# EAGLE board SparkFun_HX711_Load_Cell-Panel-v11 (EAGLE 7.5.0), part 1 of 4
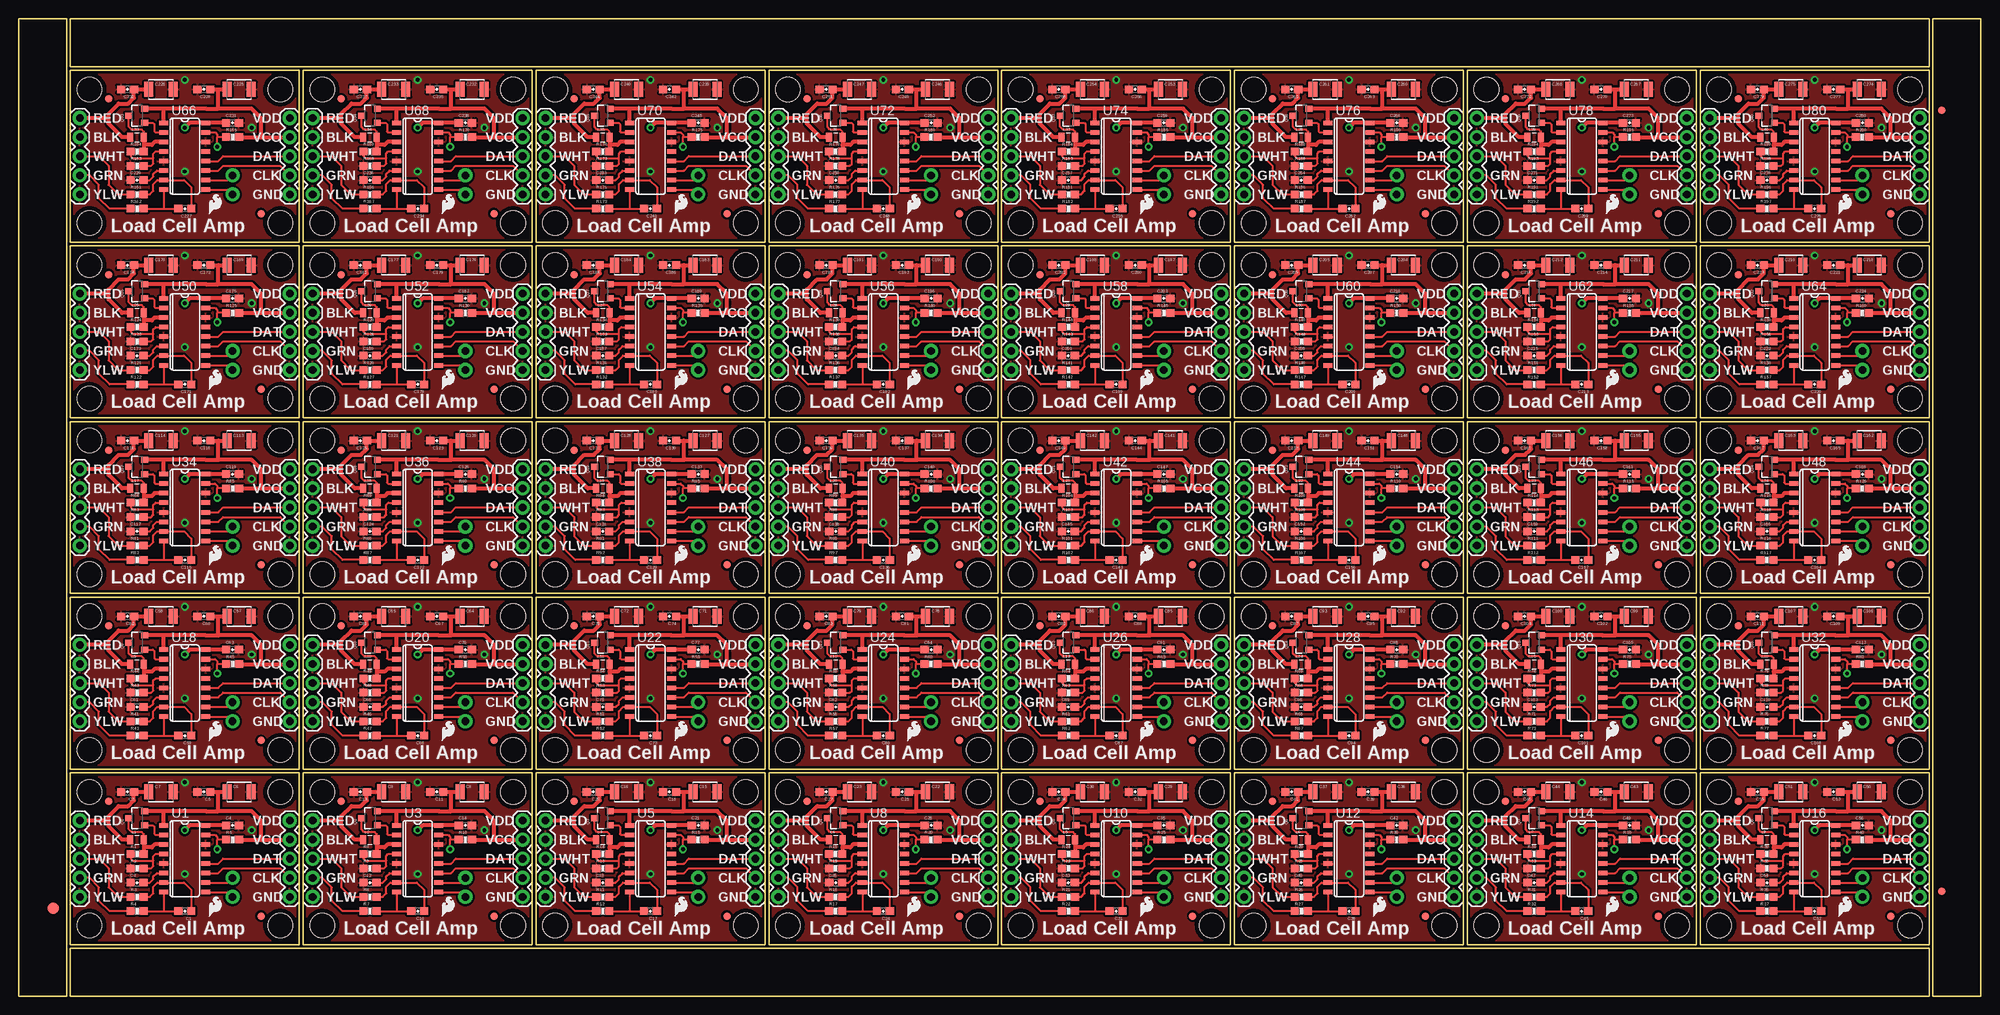
[diagram p0: board, top side]
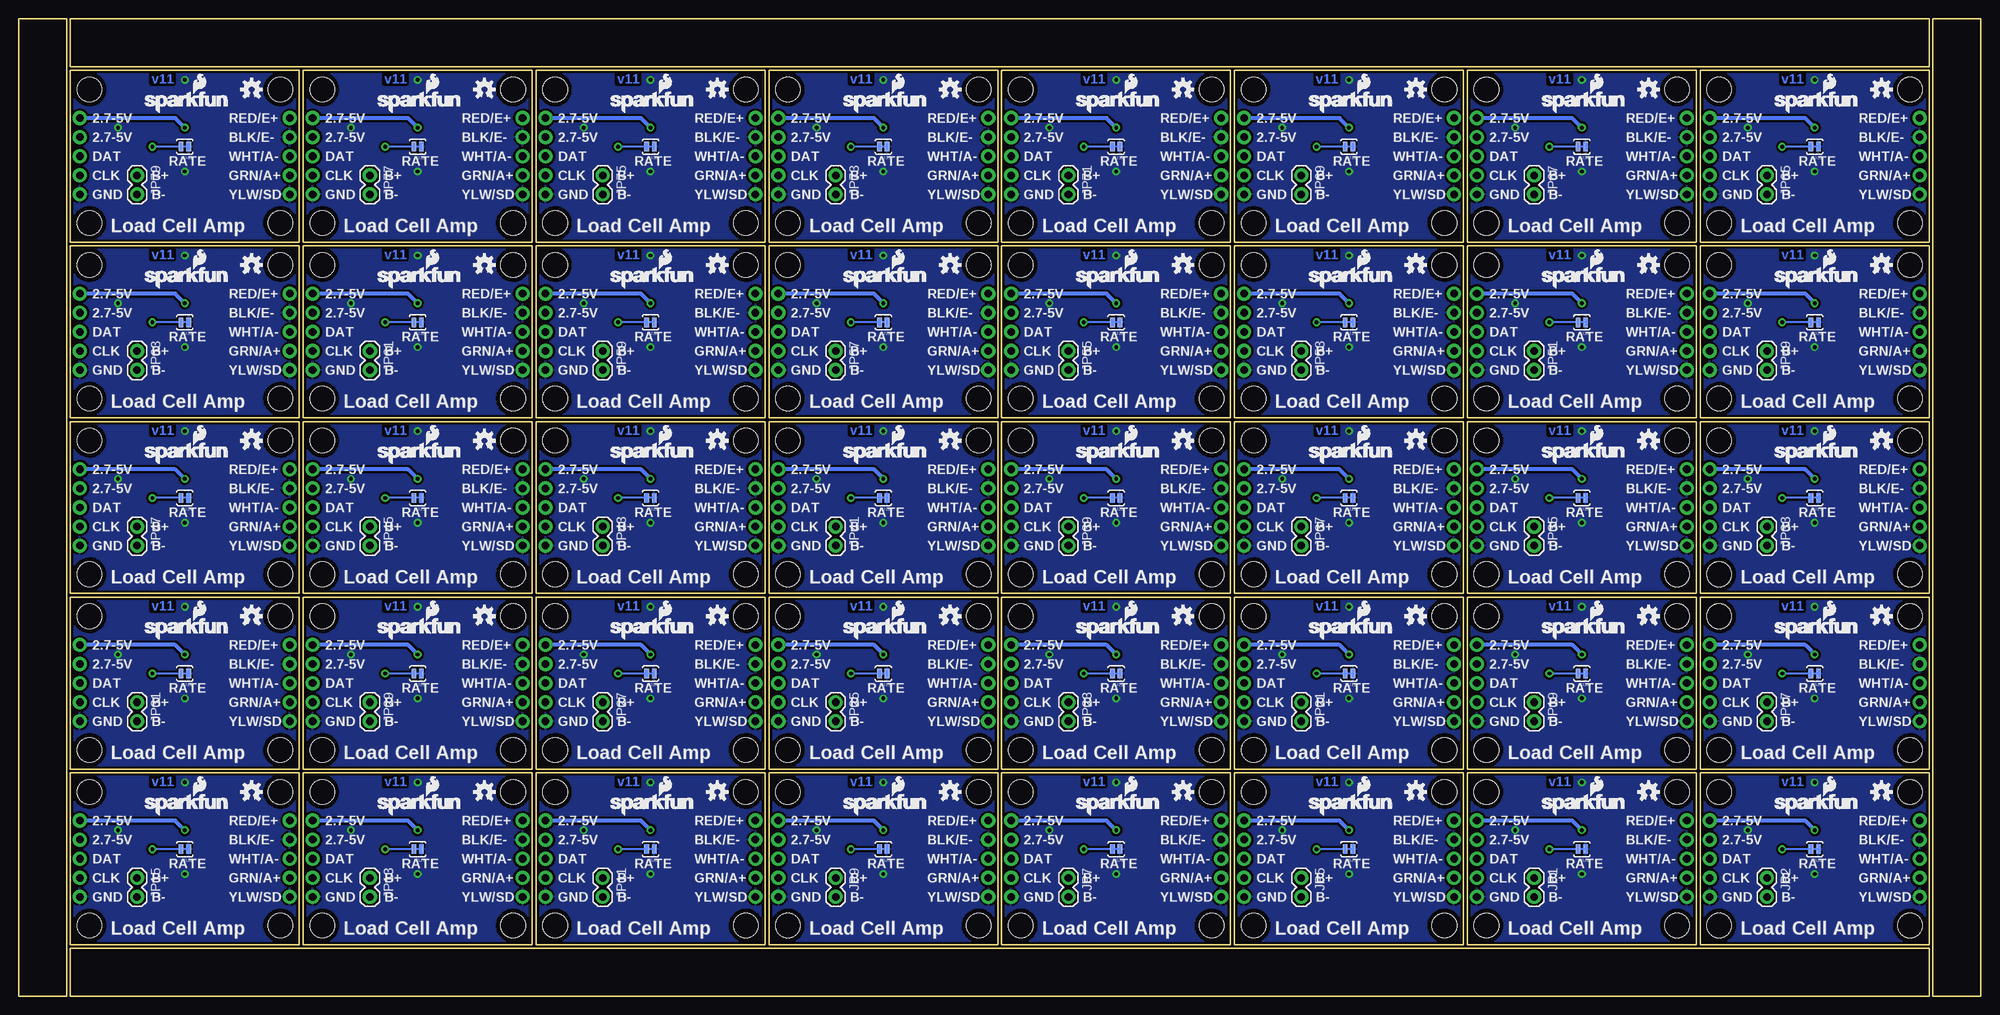
[diagram p1: board, bottom side, seen from below]

Size 261.11 x 130.05 mm. Coordinates in mm from the lower left corner, seen from the top.
Outline: 184 segments
Copper layers (1*16): Top 0.035mm / dielectric 1.5mm / Bottom 0.035mm
Design rules "SparkFun-2-layer-STANDARD": minimum track width 10mil, minimum drill 20mil, track to track 10mil, track to pad 8mil, pad to pad 8mil, via to via 10mil, smd to smd 8mil, copper to edge 8mil, drill to drill 8mil, minimum pad ring 10mil, minimum via ring 10mil, stop-mask expansion 4mil, vias tented up to drill 25mil, thermal gap 10mil

## Footprints (pad centres in the part's own frame; a part is rotated, then mirrored left to right if it is on the bottom)
0603-CAP = smd 1.1 x 1: 1 -0.85,0; 2 0.85,0
1210 = smd 1.2 x 2: 1 -1.6,0; 2 1.6,0
FIDUCIAL-1.5X3 = smd 1.5 x 1.5: 1 0,0
FIDUCIAL-1X2 = smd 1 x 1: 1 0,0
1X05 = drill 1.016 pad 1.88: 1 0,0; 2 2.54,0; 3 5.08,0; 4 7.62,0; 5 10.16,0
1X02 = drill 1.016 pad 1.88: 1 0,0; 2 2.54,0
0805 = smd 0.8 x 1.2: 1 -0.9,0; 2 0.9,0
SOT23-3 = smd 0.8 x 0.9: 1 -0.95,-1; 2 0.95,-1; 3 0,1.1
0603-RES = smd 1.1 x 1: 1 -0.85,0; 2 0.85,0
PAD-JUMPER-2-NC_BY_TRACE_YES_SILK = smd 0.635 x 1.27: 1 -0.508,0; 2 0.508,0
STAND-OFF = hole 3.302: 0,0
SO16 = smd 0.6 x 1.2: 1 -4.445,-2.8; 2 -3.175,-2.8; 3 -1.905,-2.8; 4 -0.635,-2.8; 5 0.635,-2.8; 6 1.905,-2.8; 7 3.175,-2.8; 8 4.445,-2.8; 9 4.445,2.8; 10 3.175,2.8; 11 1.905,2.8; 12 0.635,2.8; 13 -0.635,2.8; 14 -1.905,2.8; 15 -3.175,2.8; 16 -4.445,2.8

## Placement (x,y rotation side)
C1  0.1uF  [0603-CAP]  22.1,11.3 180 top
C2  0.1uF  [0603-CAP]  15.75,15.11 0 top
C3  0.1uF  [0603-CAP]  14.48,27.18 180 top
C4  0.1uF  [0603-CAP]  28.45,22.73 0 top
C5  0.1uF  [0603-CAP]  24.64,27.18 180 top
C6  10uF  [1210]  29.34,27.18 0 top
C7  10uF  [1210]  18.92,27.18 0 top
C8  10uF  [1210]  60.33,27.18 0 top
C9  10uF  [1210]  49.91,27.18 0 top
C10  0.1uF  [0603-CAP]  53.09,11.3 180 top
C11  0.1uF  [0603-CAP]  55.63,27.18 180 top
C12  0.1uF  [0603-CAP]  46.74,15.11 0 top
C13  0.1uF  [0603-CAP]  45.47,27.18 180 top
C14  0.1uF  [0603-CAP]  59.44,22.73 0 top
C15  10uF  [1210]  91.31,27.18 0 top
C16  10uF  [1210]  80.9,27.18 0 top
C17  0.1uF  [0603-CAP]  84.07,11.3 180 top
C18  0.1uF  [0603-CAP]  86.61,27.18 180 top
C19  0.1uF  [0603-CAP]  77.72,15.11 0 top
C20  0.1uF  [0603-CAP]  76.45,27.18 180 top
C21  0.1uF  [0603-CAP]  90.42,22.73 0 top
C22  10uF  [1210]  122.3,27.18 0 top
C23  10uF  [1210]  111.89,27.18 0 top
C24  0.1uF  [0603-CAP]  115.06,11.3 180 top
C25  0.1uF  [0603-CAP]  117.6,27.18 180 top
C26  0.1uF  [0603-CAP]  108.71,15.11 0 top
C27  0.1uF  [0603-CAP]  107.44,27.18 180 top
C28  0.1uF  [0603-CAP]  121.41,22.73 0 top
C29  10uF  [1210]  153.29,27.18 0 top
C30  10uF  [1210]  142.88,27.18 0 top
C31  0.1uF  [0603-CAP]  146.05,11.3 180 top
C32  0.1uF  [0603-CAP]  148.59,27.18 180 top
C33  0.1uF  [0603-CAP]  139.7,15.11 0 top
C34  0.1uF  [0603-CAP]  138.43,27.18 180 top
C35  0.1uF  [0603-CAP]  152.4,22.73 0 top
C36  10uF  [1210]  184.28,27.18 0 top
C37  10uF  [1210]  173.86,27.18 0 top
C38  0.1uF  [0603-CAP]  177.04,11.3 180 top
C39  0.1uF  [0603-CAP]  179.58,27.18 180 top
C40  0.1uF  [0603-CAP]  170.69,15.11 0 top
C41  0.1uF  [0603-CAP]  169.42,27.18 180 top
C42  0.1uF  [0603-CAP]  183.39,22.73 0 top
C43  10uF  [1210]  215.26,27.18 0 top
C44  10uF  [1210]  204.85,27.18 0 top
C45  0.1uF  [0603-CAP]  208.03,11.3 180 top
C46  0.1uF  [0603-CAP]  210.57,27.18 180 top
C47  0.1uF  [0603-CAP]  201.68,15.11 0 top
C48  0.1uF  [0603-CAP]  200.41,27.18 180 top
C49  0.1uF  [0603-CAP]  214.38,22.73 0 top
C50  10uF  [1210]  246.25,27.18 0 top
C51  10uF  [1210]  235.84,27.18 0 top
C52  0.1uF  [0603-CAP]  239.01,11.3 180 top
C53  0.1uF  [0603-CAP]  241.55,27.18 180 top
C54  0.1uF  [0603-CAP]  232.66,15.11 0 top
C55  0.1uF  [0603-CAP]  231.39,27.18 180 top
C56  0.1uF  [0603-CAP]  245.36,22.73 0 top
C57  10uF  [1210]  29.34,50.55 0 top
C58  10uF  [1210]  18.92,50.55 0 top
C59  0.1uF  [0603-CAP]  22.1,34.67 180 top
C60  0.1uF  [0603-CAP]  24.64,50.55 180 top
C61  0.1uF  [0603-CAP]  15.75,38.48 0 top
C62  0.1uF  [0603-CAP]  14.48,50.55 180 top
C63  0.1uF  [0603-CAP]  28.45,46.1 0 top
C64  10uF  [1210]  60.33,50.55 0 top
C65  10uF  [1210]  49.91,50.55 0 top
C66  0.1uF  [0603-CAP]  53.09,34.67 180 top
C67  0.1uF  [0603-CAP]  55.63,50.55 180 top
C68  0.1uF  [0603-CAP]  46.74,38.48 0 top
C69  0.1uF  [0603-CAP]  45.47,50.55 180 top
C70  0.1uF  [0603-CAP]  59.44,46.1 0 top
C71  10uF  [1210]  91.31,50.55 0 top
C72  10uF  [1210]  80.9,50.55 0 top
C73  0.1uF  [0603-CAP]  84.07,34.67 180 top
C74  0.1uF  [0603-CAP]  86.61,50.55 180 top
C75  0.1uF  [0603-CAP]  77.72,38.48 0 top
C76  0.1uF  [0603-CAP]  76.45,50.55 180 top
C77  0.1uF  [0603-CAP]  90.42,46.1 0 top
C78  10uF  [1210]  122.3,50.55 0 top
C79  10uF  [1210]  111.89,50.55 0 top
C80  0.1uF  [0603-CAP]  115.06,34.67 180 top
C81  0.1uF  [0603-CAP]  117.6,50.55 180 top
C82  0.1uF  [0603-CAP]  108.71,38.48 0 top
C83  0.1uF  [0603-CAP]  107.44,50.55 180 top
C84  0.1uF  [0603-CAP]  121.41,46.1 0 top
C85  10uF  [1210]  153.29,50.55 0 top
C86  10uF  [1210]  142.88,50.55 0 top
C87  0.1uF  [0603-CAP]  146.05,34.67 180 top
C88  0.1uF  [0603-CAP]  148.59,50.55 180 top
C89  0.1uF  [0603-CAP]  139.7,38.48 0 top
C90  0.1uF  [0603-CAP]  138.43,50.55 180 top
C91  0.1uF  [0603-CAP]  152.4,46.1 0 top
C92  10uF  [1210]  184.28,50.55 0 top
C93  10uF  [1210]  173.86,50.55 0 top
C94  0.1uF  [0603-CAP]  177.04,34.67 180 top
C95  0.1uF  [0603-CAP]  179.58,50.55 180 top
C96  0.1uF  [0603-CAP]  170.69,38.48 0 top
C97  0.1uF  [0603-CAP]  169.42,50.55 180 top
C98  0.1uF  [0603-CAP]  183.39,46.1 0 top
C99  10uF  [1210]  215.26,50.55 0 top
C100  10uF  [1210]  204.85,50.55 0 top
C101  0.1uF  [0603-CAP]  208.03,34.67 180 top
C102  0.1uF  [0603-CAP]  210.57,50.55 180 top
C103  0.1uF  [0603-CAP]  201.68,38.48 0 top
C104  0.1uF  [0603-CAP]  200.41,50.55 180 top
C105  0.1uF  [0603-CAP]  214.38,46.1 0 top
C106  10uF  [1210]  246.25,50.55 0 top
C107  10uF  [1210]  235.84,50.55 0 top
C108  0.1uF  [0603-CAP]  239.01,34.67 180 top
C109  0.1uF  [0603-CAP]  241.55,50.55 180 top
C110  0.1uF  [0603-CAP]  232.66,38.48 0 top
C111  0.1uF  [0603-CAP]  231.39,50.55 180 top
C112  0.1uF  [0603-CAP]  245.36,46.1 0 top
C113  10uF  [1210]  29.34,73.91 0 top
C114  10uF  [1210]  18.92,73.91 0 top
C115  0.1uF  [0603-CAP]  22.1,58.04 180 top
C116  0.1uF  [0603-CAP]  24.64,73.91 180 top
C117  0.1uF  [0603-CAP]  15.75,61.85 0 top
C118  0.1uF  [0603-CAP]  14.48,73.91 180 top
C119  0.1uF  [0603-CAP]  28.45,69.47 0 top
C120  10uF  [1210]  60.33,73.91 0 top
C121  10uF  [1210]  49.91,73.91 0 top
C122  0.1uF  [0603-CAP]  53.09,58.04 180 top
C123  0.1uF  [0603-CAP]  55.63,73.91 180 top
C124  0.1uF  [0603-CAP]  46.74,61.85 0 top
C125  0.1uF  [0603-CAP]  45.47,73.91 180 top
C126  0.1uF  [0603-CAP]  59.44,69.47 0 top
C127  10uF  [1210]  91.31,73.91 0 top
C128  10uF  [1210]  80.9,73.91 0 top
C129  0.1uF  [0603-CAP]  84.07,58.04 180 top
C130  0.1uF  [0603-CAP]  86.61,73.91 180 top
C131  0.1uF  [0603-CAP]  77.72,61.85 0 top
C132  0.1uF  [0603-CAP]  76.45,73.91 180 top
C133  0.1uF  [0603-CAP]  90.42,69.47 0 top
C134  10uF  [1210]  122.3,73.91 0 top
C135  10uF  [1210]  111.89,73.91 0 top
C136  0.1uF  [0603-CAP]  115.06,58.04 180 top
C137  0.1uF  [0603-CAP]  117.6,73.91 180 top
C138  0.1uF  [0603-CAP]  108.71,61.85 0 top
C139  0.1uF  [0603-CAP]  107.44,73.91 180 top
C140  0.1uF  [0603-CAP]  121.41,69.47 0 top
C141  10uF  [1210]  153.29,73.91 0 top
C142  10uF  [1210]  142.88,73.91 0 top
C143  0.1uF  [0603-CAP]  146.05,58.04 180 top
C144  0.1uF  [0603-CAP]  148.59,73.91 180 top
C145  0.1uF  [0603-CAP]  139.7,61.85 0 top
C146  0.1uF  [0603-CAP]  138.43,73.91 180 top
C147  0.1uF  [0603-CAP]  152.4,69.47 0 top
C148  10uF  [1210]  184.28,73.91 0 top
C149  10uF  [1210]  173.86,73.91 0 top
C150  0.1uF  [0603-CAP]  177.04,58.04 180 top
C151  0.1uF  [0603-CAP]  179.58,73.91 180 top
C152  0.1uF  [0603-CAP]  170.69,61.85 0 top
C153  0.1uF  [0603-CAP]  169.42,73.91 180 top
C154  0.1uF  [0603-CAP]  183.39,69.47 0 top
C155  10uF  [1210]  215.26,73.91 0 top
C156  10uF  [1210]  204.85,73.91 0 top
C157  0.1uF  [0603-CAP]  208.03,58.04 180 top
C158  0.1uF  [0603-CAP]  210.57,73.91 180 top
C159  0.1uF  [0603-CAP]  201.68,61.85 0 top
C160  0.1uF  [0603-CAP]  200.41,73.91 180 top
C161  0.1uF  [0603-CAP]  214.38,69.47 0 top
C162  10uF  [1210]  246.25,73.91 0 top
C163  10uF  [1210]  235.84,73.91 0 top
C164  0.1uF  [0603-CAP]  239.01,58.04 180 top
C165  0.1uF  [0603-CAP]  241.55,73.91 180 top
C166  0.1uF  [0603-CAP]  232.66,61.85 0 top
C167  0.1uF  [0603-CAP]  231.39,73.91 180 top
C168  0.1uF  [0603-CAP]  245.36,69.47 0 top
C169  10uF  [1210]  29.34,97.28 0 top
C170  10uF  [1210]  18.92,97.28 0 top
C171  0.1uF  [0603-CAP]  22.1,81.41 180 top
C172  0.1uF  [0603-CAP]  24.64,97.28 180 top
C173  0.1uF  [0603-CAP]  15.75,85.22 0 top
C174  0.1uF  [0603-CAP]  14.48,97.28 180 top
C175  0.1uF  [0603-CAP]  28.45,92.84 0 top
C176  10uF  [1210]  60.33,97.28 0 top
C177  10uF  [1210]  49.91,97.28 0 top
C178  0.1uF  [0603-CAP]  53.09,81.41 180 top
C179  0.1uF  [0603-CAP]  55.63,97.28 180 top
C180  0.1uF  [0603-CAP]  46.74,85.22 0 top
C181  0.1uF  [0603-CAP]  45.47,97.28 180 top
C182  0.1uF  [0603-CAP]  59.44,92.84 0 top
C183  10uF  [1210]  91.31,97.28 0 top
C184  10uF  [1210]  80.9,97.28 0 top
C185  0.1uF  [0603-CAP]  84.07,81.41 180 top
C186  0.1uF  [0603-CAP]  86.61,97.28 180 top
C187  0.1uF  [0603-CAP]  77.72,85.22 0 top
C188  0.1uF  [0603-CAP]  76.45,97.28 180 top
C189  0.1uF  [0603-CAP]  90.42,92.84 0 top
C190  10uF  [1210]  122.3,97.28 0 top
C191  10uF  [1210]  111.89,97.28 0 top
C192  0.1uF  [0603-CAP]  115.06,81.41 180 top
C193  0.1uF  [0603-CAP]  117.6,97.28 180 top
C194  0.1uF  [0603-CAP]  108.71,85.22 0 top
C195  0.1uF  [0603-CAP]  107.44,97.28 180 top
C196  0.1uF  [0603-CAP]  121.41,92.84 0 top
C197  10uF  [1210]  153.29,97.28 0 top
C198  10uF  [1210]  142.88,97.28 0 top
C199  0.1uF  [0603-CAP]  146.05,81.41 180 top
C200  0.1uF  [0603-CAP]  148.59,97.28 180 top
C201  0.1uF  [0603-CAP]  139.7,85.22 0 top
C202  0.1uF  [0603-CAP]  138.43,97.28 180 top
C203  0.1uF  [0603-CAP]  152.4,92.84 0 top
C204  10uF  [1210]  184.28,97.28 0 top
C205  10uF  [1210]  173.86,97.28 0 top
C206  0.1uF  [0603-CAP]  177.04,81.41 180 top
C207  0.1uF  [0603-CAP]  179.58,97.28 180 top
C208  0.1uF  [0603-CAP]  170.69,85.22 0 top
C209  0.1uF  [0603-CAP]  169.42,97.28 180 top
C210  0.1uF  [0603-CAP]  183.39,92.84 0 top
C211  10uF  [1210]  215.26,97.28 0 top
C212  10uF  [1210]  204.85,97.28 0 top
C213  0.1uF  [0603-CAP]  208.03,81.41 180 top
C214  0.1uF  [0603-CAP]  210.57,97.28 180 top
C215  0.1uF  [0603-CAP]  201.68,85.22 0 top
C216  0.1uF  [0603-CAP]  200.41,97.28 180 top
C217  0.1uF  [0603-CAP]  214.38,92.84 0 top
C218  10uF  [1210]  246.25,97.28 0 top
C219  10uF  [1210]  235.84,97.28 0 top
C220  0.1uF  [0603-CAP]  239.01,81.41 180 top
C221  0.1uF  [0603-CAP]  241.55,97.28 180 top
C222  0.1uF  [0603-CAP]  232.66,85.22 0 top
C223  0.1uF  [0603-CAP]  231.39,97.28 180 top
C224  0.1uF  [0603-CAP]  245.36,92.84 0 top
C225  10uF  [1210]  29.34,120.65 0 top
C226  10uF  [1210]  18.92,120.65 0 top
C227  0.1uF  [0603-CAP]  22.1,104.78 180 top
C228  0.1uF  [0603-CAP]  24.64,120.65 180 top
C229  0.1uF  [0603-CAP]  15.75,108.58 0 top
C230  0.1uF  [0603-CAP]  14.48,120.65 180 top
C231  0.1uF  [0603-CAP]  28.45,116.2 0 top
C232  10uF  [1210]  60.33,120.65 0 top
C233  10uF  [1210]  49.91,120.65 0 top
C234  0.1uF  [0603-CAP]  53.09,104.78 180 top
C235  0.1uF  [0603-CAP]  55.63,120.65 180 top
C236  0.1uF  [0603-CAP]  46.74,108.58 0 top
C237  0.1uF  [0603-CAP]  45.47,120.65 180 top
C238  0.1uF  [0603-CAP]  59.44,116.2 0 top
C239  10uF  [1210]  91.31,120.65 0 top
C240  10uF  [1210]  80.9,120.65 0 top
C241  0.1uF  [0603-CAP]  84.07,104.78 180 top
C242  0.1uF  [0603-CAP]  86.61,120.65 180 top
C243  0.1uF  [0603-CAP]  77.72,108.58 0 top
C244  0.1uF  [0603-CAP]  76.45,120.65 180 top
C245  0.1uF  [0603-CAP]  90.42,116.2 0 top
C246  10uF  [1210]  122.3,120.65 0 top
C247  10uF  [1210]  111.89,120.65 0 top
C248  0.1uF  [0603-CAP]  115.06,104.78 180 top
C249  0.1uF  [0603-CAP]  117.6,120.65 180 top
C250  0.1uF  [0603-CAP]  108.71,108.58 0 top
C251  0.1uF  [0603-CAP]  107.44,120.65 180 top
C252  0.1uF  [0603-CAP]  121.41,116.2 0 top
C253  10uF  [1210]  153.29,120.65 0 top
C254  10uF  [1210]  142.88,120.65 0 top
C255  0.1uF  [0603-CAP]  146.05,104.78 180 top
C256  0.1uF  [0603-CAP]  148.59,120.65 180 top
C257  0.1uF  [0603-CAP]  139.7,108.58 0 top
C258  0.1uF  [0603-CAP]  138.43,120.65 180 top
C259  0.1uF  [0603-CAP]  152.4,116.2 0 top
C260  10uF  [1210]  184.28,120.65 0 top
C261  10uF  [1210]  173.86,120.65 0 top
C262  0.1uF  [0603-CAP]  177.04,104.78 180 top
C263  0.1uF  [0603-CAP]  179.58,120.65 180 top
C264  0.1uF  [0603-CAP]  170.69,108.58 0 top
C265  0.1uF  [0603-CAP]  169.42,120.65 180 top
C266  0.1uF  [0603-CAP]  183.39,116.2 0 top
C267  10uF  [1210]  215.26,120.65 0 top
C268  10uF  [1210]  204.85,120.65 0 top
C269  0.1uF  [0603-CAP]  208.03,104.78 180 top
C270  0.1uF  [0603-CAP]  210.57,120.65 180 top
C271  0.1uF  [0603-CAP]  201.68,108.58 0 top
C272  0.1uF  [0603-CAP]  200.41,120.65 180 top
C273  0.1uF  [0603-CAP]  214.38,116.2 0 top
C274  10uF  [1210]  246.25,120.65 0 top
C275  10uF  [1210]  235.84,120.65 0 top
C276  0.1uF  [0603-CAP]  239.01,104.78 180 top
C277  0.1uF  [0603-CAP]  241.55,120.65 180 top
C278  0.1uF  [0603-CAP]  232.66,108.58 0 top
C279  0.1uF  [0603-CAP]  231.39,120.65 180 top
C280  0.1uF  [0603-CAP]  245.36,116.2 0 top
E$1  [FIDUCIAL-1.5X3]  4.57,11.68 0 top
E$5  [FIDUCIAL-1X2]  255.91,13.97 0 top
E$6  [FIDUCIAL-1X2]  255.91,117.86 180 top
FID1  FIDUCIAL1X2  [FIDUCIAL-1X2]  11.94,25.91 0 top
FID2  FIDUCIAL1X2  [FIDUCIAL-1X2]  32.26,10.67 0 top
FID3  FIDUCIAL1X2  [FIDUCIAL-1X2]  42.93,25.91 0 top
FID4  FIDUCIAL1X2  [FIDUCIAL-1X2]  63.25,10.67 0 top
FID5  FIDUCIAL1X2  [FIDUCIAL-1X2]  73.91,25.91 0 top
FID6  FIDUCIAL1X2  [FIDUCIAL-1X2]  94.23,10.67 0 top
FID7  FIDUCIAL1X2  [FIDUCIAL-1X2]  104.9,25.91 0 top
FID8  FIDUCIAL1X2  [FIDUCIAL-1X2]  125.22,10.67 0 top
FID9  FIDUCIAL1X2  [FIDUCIAL-1X2]  135.89,25.91 0 top
FID10  FIDUCIAL1X2  [FIDUCIAL-1X2]  156.21,10.67 0 top
FID11  FIDUCIAL1X2  [FIDUCIAL-1X2]  166.88,25.91 0 top
FID12  FIDUCIAL1X2  [FIDUCIAL-1X2]  187.2,10.67 0 top
FID13  FIDUCIAL1X2  [FIDUCIAL-1X2]  197.87,25.91 0 top
FID14  FIDUCIAL1X2  [FIDUCIAL-1X2]  218.19,10.67 0 top
FID15  FIDUCIAL1X2  [FIDUCIAL-1X2]  228.85,25.91 0 top
FID16  FIDUCIAL1X2  [FIDUCIAL-1X2]  249.17,10.67 0 top
FID17  FIDUCIAL1X2  [FIDUCIAL-1X2]  11.94,49.28 0 top
FID18  FIDUCIAL1X2  [FIDUCIAL-1X2]  32.26,34.04 0 top
FID19  FIDUCIAL1X2  [FIDUCIAL-1X2]  42.93,49.28 0 top
FID20  FIDUCIAL1X2  [FIDUCIAL-1X2]  63.25,34.04 0 top
FID21  FIDUCIAL1X2  [FIDUCIAL-1X2]  73.91,49.28 0 top
FID22  FIDUCIAL1X2  [FIDUCIAL-1X2]  94.23,34.04 0 top
FID23  FIDUCIAL1X2  [FIDUCIAL-1X2]  104.9,49.28 0 top
FID24  FIDUCIAL1X2  [FIDUCIAL-1X2]  125.22,34.04 0 top
FID25  FIDUCIAL1X2  [FIDUCIAL-1X2]  135.89,49.28 0 top
FID26  FIDUCIAL1X2  [FIDUCIAL-1X2]  156.21,34.04 0 top
FID27  FIDUCIAL1X2  [FIDUCIAL-1X2]  166.88,49.28 0 top
FID28  FIDUCIAL1X2  [FIDUCIAL-1X2]  187.2,34.04 0 top
FID29  FIDUCIAL1X2  [FIDUCIAL-1X2]  197.87,49.28 0 top
FID30  FIDUCIAL1X2  [FIDUCIAL-1X2]  218.19,34.04 0 top
FID31  FIDUCIAL1X2  [FIDUCIAL-1X2]  228.85,49.28 0 top
FID32  FIDUCIAL1X2  [FIDUCIAL-1X2]  249.17,34.04 0 top
FID33  FIDUCIAL1X2  [FIDUCIAL-1X2]  11.94,72.64 0 top
FID34  FIDUCIAL1X2  [FIDUCIAL-1X2]  32.26,57.4 0 top
FID35  FIDUCIAL1X2  [FIDUCIAL-1X2]  42.93,72.64 0 top
FID36  FIDUCIAL1X2  [FIDUCIAL-1X2]  63.25,57.4 0 top
FID37  FIDUCIAL1X2  [FIDUCIAL-1X2]  73.91,72.64 0 top
FID38  FIDUCIAL1X2  [FIDUCIAL-1X2]  94.23,57.4 0 top
FID39  FIDUCIAL1X2  [FIDUCIAL-1X2]  104.9,72.64 0 top
FID40  FIDUCIAL1X2  [FIDUCIAL-1X2]  125.22,57.4 0 top
FID41  FIDUCIAL1X2  [FIDUCIAL-1X2]  135.89,72.64 0 top
FID42  FIDUCIAL1X2  [FIDUCIAL-1X2]  156.21,57.4 0 top
FID43  FIDUCIAL1X2  [FIDUCIAL-1X2]  166.88,72.64 0 top
FID44  FIDUCIAL1X2  [FIDUCIAL-1X2]  187.2,57.4 0 top
FID45  FIDUCIAL1X2  [FIDUCIAL-1X2]  197.87,72.64 0 top
FID46  FIDUCIAL1X2  [FIDUCIAL-1X2]  218.19,57.4 0 top
FID47  FIDUCIAL1X2  [FIDUCIAL-1X2]  228.85,72.64 0 top
FID48  FIDUCIAL1X2  [FIDUCIAL-1X2]  249.17,57.4 0 top
FID49  FIDUCIAL1X2  [FIDUCIAL-1X2]  11.94,96.01 0 top
FID50  FIDUCIAL1X2  [FIDUCIAL-1X2]  32.26,80.77 0 top
FID51  FIDUCIAL1X2  [FIDUCIAL-1X2]  42.93,96.01 0 top
FID52  FIDUCIAL1X2  [FIDUCIAL-1X2]  63.25,80.77 0 top
FID53  FIDUCIAL1X2  [FIDUCIAL-1X2]  73.91,96.01 0 top
FID54  FIDUCIAL1X2  [FIDUCIAL-1X2]  94.23,80.77 0 top
FID55  FIDUCIAL1X2  [FIDUCIAL-1X2]  104.9,96.01 0 top
FID56  FIDUCIAL1X2  [FIDUCIAL-1X2]  125.22,80.77 0 top
FID57  FIDUCIAL1X2  [FIDUCIAL-1X2]  135.89,96.01 0 top
FID58  FIDUCIAL1X2  [FIDUCIAL-1X2]  156.21,80.77 0 top
FID59  FIDUCIAL1X2  [FIDUCIAL-1X2]  166.88,96.01 0 top
FID60  FIDUCIAL1X2  [FIDUCIAL-1X2]  187.2,80.77 0 top
FID61  FIDUCIAL1X2  [FIDUCIAL-1X2]  197.87,96.01 0 top
FID62  FIDUCIAL1X2  [FIDUCIAL-1X2]  218.19,80.77 0 top
FID63  FIDUCIAL1X2  [FIDUCIAL-1X2]  228.85,96.01 0 top
FID64  FIDUCIAL1X2  [FIDUCIAL-1X2]  249.17,80.77 0 top
FID65  FIDUCIAL1X2  [FIDUCIAL-1X2]  11.94,119.38 0 top
FID66  FIDUCIAL1X2  [FIDUCIAL-1X2]  32.26,104.14 0 top
FID67  FIDUCIAL1X2  [FIDUCIAL-1X2]  42.93,119.38 0 top
FID68  FIDUCIAL1X2  [FIDUCIAL-1X2]  63.25,104.14 0 top
FID69  FIDUCIAL1X2  [FIDUCIAL-1X2]  73.91,119.38 0 top
FID70  FIDUCIAL1X2  [FIDUCIAL-1X2]  94.23,104.14 0 top
FID71  FIDUCIAL1X2  [FIDUCIAL-1X2]  104.9,119.38 0 top
FID72  FIDUCIAL1X2  [FIDUCIAL-1X2]  125.22,104.14 0 top
FID73  FIDUCIAL1X2  [FIDUCIAL-1X2]  135.89,119.38 0 top
FID74  FIDUCIAL1X2  [FIDUCIAL-1X2]  156.21,104.14 0 top
FID75  FIDUCIAL1X2  [FIDUCIAL-1X2]  166.88,119.38 0 top
FID76  FIDUCIAL1X2  [FIDUCIAL-1X2]  187.2,104.14 0 top
FID77  FIDUCIAL1X2  [FIDUCIAL-1X2]  197.87,119.38 0 top
FID78  FIDUCIAL1X2  [FIDUCIAL-1X2]  218.19,104.14 0 top
FID79  FIDUCIAL1X2  [FIDUCIAL-1X2]  228.85,119.38 0 top
FID80  FIDUCIAL1X2  [FIDUCIAL-1X2]  249.17,104.14 0 top
J1  [1X05]  36.07,23.37 270 top
J2  [1X05]  67.06,23.37 270 top
J3  [1X05]  98.04,23.37 270 top
J4  [1X05]  129.03,23.37 270 top
J5  [1X05]  160.02,23.37 270 top
J6  [1X05]  191.01,23.37 270 top
J7  [1X05]  222,23.37 270 top
J8  [1X05]  252.98,23.37 270 top
J9  [1X05]  36.07,46.74 270 top
J10  [1X05]  67.06,46.74 270 top
J11  [1X05]  98.04,46.74 270 top
J12  [1X05]  129.03,46.74 270 top
J13  [1X05]  160.02,46.74 270 top
J14  [1X05]  191.01,46.74 270 top
J15  [1X05]  222,46.74 270 top
J16  [1X05]  252.98,46.74 270 top
J17  [1X05]  36.07,70.1 270 top
J18  [1X05]  67.06,70.1 270 top
J19  [1X05]  98.04,70.1 270 top
J20  [1X05]  129.03,70.1 270 top
J21  [1X05]  160.02,70.1 270 top
J22  [1X05]  191.01,70.1 270 top
J23  [1X05]  222,70.1 270 top
J24  [1X05]  252.98,70.1 270 top
J25  [1X05]  36.07,93.47 270 top
J26  [1X05]  67.06,93.47 270 top
J27  [1X05]  98.04,93.47 270 top
J28  [1X05]  129.03,93.47 270 top
J29  [1X05]  160.02,93.47 270 top
J30  [1X05]  191.01,93.47 270 top
J31  [1X05]  222,93.47 270 top
J32  [1X05]  252.98,93.47 270 top
J33  [1X05]  36.07,116.84 270 top
J34  [1X05]  67.06,116.84 270 top
J35  [1X05]  98.04,116.84 270 top
J36  [1X05]  129.03,116.84 270 top
J37  [1X05]  160.02,116.84 270 top
J38  [1X05]  191.01,116.84 270 top
J39  [1X05]  222,116.84 270 top
J40  [1X05]  252.98,116.84 270 top
JP1  [1X02]  59.44,15.75 270 bottom
JP2  [1X02]  28.45,15.75 270 bottom
JP3  [1X05]  39.12,13.21 90 top
JP4  [1X05]  8.13,13.21 90 top
JP5  [1X02]  90.42,15.75 270 bottom
JP6  [1X05]  70.1,13.21 90 top
JP7  [1X02]  121.41,15.75 270 bottom
JP8  [1X05]  101.09,13.21 90 top
JP9  [1X02]  152.4,15.75 270 bottom
JP10  [1X05]  132.08,13.21 90 top
JP11  [1X02]  183.39,15.75 270 bottom
JP12  [1X05]  163.07,13.21 90 top
JP13  [1X02]  214.38,15.75 270 bottom
JP14  [1X05]  194.06,13.21 90 top
JP15  [1X02]  245.36,15.75 270 bottom
JP16  [1X05]  225.04,13.21 90 top
JP17  [1X02]  28.45,39.12 270 bottom
JP18  [1X05]  8.13,36.58 90 top
JP19  [1X02]  59.44,39.12 270 bottom
JP20  [1X05]  39.12,36.58 90 top
JP21  [1X02]  90.42,39.12 270 bottom
JP22  [1X05]  70.1,36.58 90 top
JP23  [1X02]  121.41,39.12 270 bottom
JP24  [1X05]  101.09,36.58 90 top
JP25  [1X02]  152.4,39.12 270 bottom
JP26  [1X05]  132.08,36.58 90 top
JP27  [1X02]  183.39,39.12 270 bottom
JP28  [1X05]  163.07,36.58 90 top
JP29  [1X02]  214.38,39.12 270 bottom
JP30  [1X05]  194.06,36.58 90 top
JP31  [1X02]  245.36,39.12 270 bottom
JP32  [1X05]  225.04,36.58 90 top
JP33  [1X02]  28.45,62.48 270 bottom
JP34  [1X05]  8.13,59.94 90 top
JP35  [1X02]  59.44,62.48 270 bottom
JP36  [1X05]  39.12,59.94 90 top
JP37  [1X02]  90.42,62.48 270 bottom
JP38  [1X05]  70.1,59.94 90 top
JP39  [1X02]  121.41,62.48 270 bottom
JP40  [1X05]  101.09,59.94 90 top
JP41  [1X02]  152.4,62.48 270 bottom
JP42  [1X05]  132.08,59.94 90 top
JP43  [1X02]  183.39,62.48 270 bottom
JP44  [1X05]  163.07,59.94 90 top
JP45  [1X02]  214.38,62.48 270 bottom
JP46  [1X05]  194.06,59.94 90 top
JP47  [1X02]  245.36,62.48 270 bottom
JP48  [1X05]  225.04,59.94 90 top
JP49  [1X02]  28.45,85.85 270 bottom
JP50  [1X05]  8.13,83.31 90 top
JP51  [1X02]  59.44,85.85 270 bottom
JP52  [1X05]  39.12,83.31 90 top
JP53  [1X02]  90.42,85.85 270 bottom
JP54  [1X05]  70.1,83.31 90 top
JP55  [1X02]  121.41,85.85 270 bottom
JP56  [1X05]  101.09,83.31 90 top
JP57  [1X02]  152.4,85.85 270 bottom
JP58  [1X05]  132.08,83.31 90 top
JP59  [1X02]  183.39,85.85 270 bottom
JP60  [1X05]  163.07,83.31 90 top
JP61  [1X02]  214.38,85.85 270 bottom
JP62  [1X05]  194.06,83.31 90 top
JP63  [1X02]  245.36,85.85 270 bottom
JP64  [1X05]  225.04,83.31 90 top
JP65  [1X02]  28.45,109.22 270 bottom
JP66  [1X05]  8.13,106.68 90 top
JP67  [1X02]  59.44,109.22 270 bottom
JP68  [1X05]  39.12,106.68 90 top
JP69  [1X02]  90.42,109.22 270 bottom
JP70  [1X05]  70.1,106.68 90 top
JP71  [1X02]  121.41,109.22 270 bottom
JP72  [1X05]  101.09,106.68 90 top
JP73  [1X02]  152.4,109.22 270 bottom
JP74  [1X05]  132.08,106.68 90 top
JP75  [1X02]  183.39,109.22 270 bottom
JP76  [1X05]  163.07,106.68 90 top
JP77  [1X02]  214.38,109.22 270 bottom
JP78  [1X05]  194.06,106.68 90 top
JP79  [1X02]  245.36,109.22 270 bottom
JP80  [1X05]  225.04,106.68 90 top
L1  3.3uH  [0805]  15.75,20.83 0 top
L2  3.3uH  [0805]  46.74,20.83 0 top
L3  3.3uH  [0805]  77.72,20.83 0 top
L4  3.3uH  [0805]  108.71,20.83 0 top
L5  3.3uH  [0805]  139.7,20.83 0 top
L6  3.3uH  [0805]  170.69,20.83 0 top
L7  3.3uH  [0805]  201.68,20.83 0 top
L8  3.3uH  [0805]  232.66,20.83 0 top
L9  3.3uH  [0805]  15.75,44.2 0 top
L10  3.3uH  [0805]  46.74,44.2 0 top
L11  3.3uH  [0805]  77.72,44.2 0 top
L12  3.3uH  [0805]  108.71,44.2 0 top
L13  3.3uH  [0805]  139.7,44.2 0 top
L14  3.3uH  [0805]  170.69,44.2 0 top
L15  3.3uH  [0805]  201.68,44.2 0 top
L16  3.3uH  [0805]  232.66,44.2 0 top
L17  3.3uH  [0805]  15.75,67.56 0 top
L18  3.3uH  [0805]  46.74,67.56 0 top
L19  3.3uH  [0805]  77.72,67.56 0 top
L20  3.3uH  [0805]  108.71,67.56 0 top
L21  3.3uH  [0805]  139.7,67.56 0 top
L22  3.3uH  [0805]  170.69,67.56 0 top
L23  3.3uH  [0805]  201.68,67.56 0 top
L24  3.3uH  [0805]  232.66,67.56 0 top
L25  3.3uH  [0805]  15.75,90.93 0 top
L26  3.3uH  [0805]  46.74,90.93 0 top
L27  3.3uH  [0805]  77.72,90.93 0 top
L28  3.3uH  [0805]  108.71,90.93 0 top
L29  3.3uH  [0805]  139.7,90.93 0 top
L30  3.3uH  [0805]  170.69,90.93 0 top
L31  3.3uH  [0805]  201.68,90.93 0 top
L32  3.3uH  [0805]  232.66,90.93 0 top
L33  3.3uH  [0805]  15.75,114.3 0 top
L34  3.3uH  [0805]  46.74,114.3 0 top
L35  3.3uH  [0805]  77.72,114.3 0 top
L36  3.3uH  [0805]  108.71,114.3 0 top
L37  3.3uH  [0805]  139.7,114.3 0 top
L38  3.3uH  [0805]  170.69,114.3 0 top
L39  3.3uH  [0805]  201.68,114.3 0 top
L40  3.3uH  [0805]  232.66,114.3 0 top
LOGO1  SFE_LOGO_NAME_FLAME.1_INCH  [SFE_LOGO_NAME_FLAME_.1]  27.81,24 0 bottom
LOGO2  SFE_LOGO_NAME_FLAME.1_INCH  [SFE_LOGO_NAME_FLAME_.1]  58.8,24 0 bottom
LOGO3  SFE_LOGO_FLAME.1_INCH  [SFE_LOGO_FLAME_.1]  25.02,10.29 0 top
LOGO4  SFE_LOGO_FLAME.1_INCH  [SFE_LOGO_FLAME_.1]  56.01,10.29 0 top
LOGO5  SFE_LOGO_NAME_FLAME.1_INCH  [SFE_LOGO_NAME_FLAME_.1]  89.79,24 0 bottom
LOGO6  SFE_LOGO_FLAME.1_INCH  [SFE_LOGO_FLAME_.1]  87,10.29 0 top
LOGO7  SFE_LOGO_NAME_FLAME.1_INCH  [SFE_LOGO_NAME_FLAME_.1]  120.78,24 0 bottom
LOGO8  SFE_LOGO_FLAME.1_INCH  [SFE_LOGO_FLAME_.1]  117.98,10.29 0 top
LOGO9  SFE_LOGO_NAME_FLAME.1_INCH  [SFE_LOGO_NAME_FLAME_.1]  151.76,24 0 bottom
LOGO10  SFE_LOGO_FLAME.1_INCH  [SFE_LOGO_FLAME_.1]  148.97,10.29 0 top
LOGO11  SFE_LOGO_NAME_FLAME.1_INCH  [SFE_LOGO_NAME_FLAME_.1]  182.75,24 0 bottom
LOGO12  SFE_LOGO_FLAME.1_INCH  [SFE_LOGO_FLAME_.1]  179.96,10.29 0 top
LOGO13  SFE_LOGO_NAME_FLAME.1_INCH  [SFE_LOGO_NAME_FLAME_.1]  213.74,24 0 bottom
LOGO14  SFE_LOGO_FLAME.1_INCH  [SFE_LOGO_FLAME_.1]  210.95,10.29 0 top
LOGO15  SFE_LOGO_NAME_FLAME.1_INCH  [SFE_LOGO_NAME_FLAME_.1]  244.73,24 0 bottom
LOGO16  SFE_LOGO_FLAME.1_INCH  [SFE_LOGO_FLAME_.1]  241.94,10.29 0 top
LOGO17  SFE_LOGO_NAME_FLAME.1_INCH  [SFE_LOGO_NAME_FLAME_.1]  27.81,47.37 0 bottom
LOGO18  SFE_LOGO_FLAME.1_INCH  [SFE_LOGO_FLAME_.1]  25.02,33.66 0 top
LOGO19  SFE_LOGO_NAME_FLAME.1_INCH  [SFE_LOGO_NAME_FLAME_.1]  58.8,47.37 0 bottom
LOGO20  SFE_LOGO_FLAME.1_INCH  [SFE_LOGO_FLAME_.1]  56.01,33.66 0 top
LOGO21  SFE_LOGO_NAME_FLAME.1_INCH  [SFE_LOGO_NAME_FLAME_.1]  89.79,47.37 0 bottom
LOGO22  SFE_LOGO_FLAME.1_INCH  [SFE_LOGO_FLAME_.1]  87,33.66 0 top
LOGO23  SFE_LOGO_NAME_FLAME.1_INCH  [SFE_LOGO_NAME_FLAME_.1]  120.78,47.37 0 bottom
LOGO24  SFE_LOGO_FLAME.1_INCH  [SFE_LOGO_FLAME_.1]  117.98,33.66 0 top
LOGO25  SFE_LOGO_NAME_FLAME.1_INCH  [SFE_LOGO_NAME_FLAME_.1]  151.76,47.37 0 bottom
LOGO26  SFE_LOGO_FLAME.1_INCH  [SFE_LOGO_FLAME_.1]  148.97,33.66 0 top
LOGO27  SFE_LOGO_NAME_FLAME.1_INCH  [SFE_LOGO_NAME_FLAME_.1]  182.75,47.37 0 bottom
LOGO28  SFE_LOGO_FLAME.1_INCH  [SFE_LOGO_FLAME_.1]  179.96,33.66 0 top
LOGO29  SFE_LOGO_NAME_FLAME.1_INCH  [SFE_LOGO_NAME_FLAME_.1]  213.74,47.37 0 bottom
LOGO30  SFE_LOGO_FLAME.1_INCH  [SFE_LOGO_FLAME_.1]  210.95,33.66 0 top
LOGO31  SFE_LOGO_NAME_FLAME.1_INCH  [SFE_LOGO_NAME_FLAME_.1]  244.73,47.37 0 bottom
LOGO32  SFE_LOGO_FLAME.1_INCH  [SFE_LOGO_FLAME_.1]  241.94,33.66 0 top
LOGO33  SFE_LOGO_NAME_FLAME.1_INCH  [SFE_LOGO_NAME_FLAME_.1]  27.81,70.74 0 bottom
LOGO34  SFE_LOGO_FLAME.1_INCH  [SFE_LOGO_FLAME_.1]  25.02,57.02 0 top
LOGO35  SFE_LOGO_NAME_FLAME.1_INCH  [SFE_LOGO_NAME_FLAME_.1]  58.8,70.74 0 bottom
LOGO36  SFE_LOGO_FLAME.1_INCH  [SFE_LOGO_FLAME_.1]  56.01,57.02 0 top
LOGO37  SFE_LOGO_NAME_FLAME.1_INCH  [SFE_LOGO_NAME_FLAME_.1]  89.79,70.74 0 bottom
LOGO38  SFE_LOGO_FLAME.1_INCH  [SFE_LOGO_FLAME_.1]  87,57.02 0 top
LOGO39  SFE_LOGO_NAME_FLAME.1_INCH  [SFE_LOGO_NAME_FLAME_.1]  120.78,70.74 0 bottom
LOGO40  SFE_LOGO_FLAME.1_INCH  [SFE_LOGO_FLAME_.1]  117.98,57.02 0 top
LOGO41  SFE_LOGO_NAME_FLAME.1_INCH  [SFE_LOGO_NAME_FLAME_.1]  151.76,70.74 0 bottom
LOGO42  SFE_LOGO_FLAME.1_INCH  [SFE_LOGO_FLAME_.1]  148.97,57.02 0 top
LOGO43  SFE_LOGO_NAME_FLAME.1_INCH  [SFE_LOGO_NAME_FLAME_.1]  182.75,70.74 0 bottom
LOGO44  SFE_LOGO_FLAME.1_INCH  [SFE_LOGO_FLAME_.1]  179.96,57.02 0 top
LOGO45  SFE_LOGO_NAME_FLAME.1_INCH  [SFE_LOGO_NAME_FLAME_.1]  213.74,70.74 0 bottom
LOGO46  SFE_LOGO_FLAME.1_INCH  [SFE_LOGO_FLAME_.1]  210.95,57.02 0 top
LOGO47  SFE_LOGO_NAME_FLAME.1_INCH  [SFE_LOGO_NAME_FLAME_.1]  244.73,70.74 0 bottom
LOGO48  SFE_LOGO_FLAME.1_INCH  [SFE_LOGO_FLAME_.1]  241.94,57.02 0 top
LOGO49  SFE_LOGO_NAME_FLAME.1_INCH  [SFE_LOGO_NAME_FLAME_.1]  27.81,94.11 0 bottom
LOGO50  SFE_LOGO_FLAME.1_INCH  [SFE_LOGO_FLAME_.1]  25.02,80.39 0 top
LOGO51  SFE_LOGO_NAME_FLAME.1_INCH  [SFE_LOGO_NAME_FLAME_.1]  58.8,94.11 0 bottom
LOGO52  SFE_LOGO_FLAME.1_INCH  [SFE_LOGO_FLAME_.1]  56.01,80.39 0 top
LOGO53  SFE_LOGO_NAME_FLAME.1_INCH  [SFE_LOGO_NAME_FLAME_.1]  89.79,94.11 0 bottom
LOGO54  SFE_LOGO_FLAME.1_INCH  [SFE_LOGO_FLAME_.1]  87,80.39 0 top
LOGO55  SFE_LOGO_NAME_FLAME.1_INCH  [SFE_LOGO_NAME_FLAME_.1]  120.78,94.11 0 bottom
LOGO56  SFE_LOGO_FLAME.1_INCH  [SFE_LOGO_FLAME_.1]  117.98,80.39 0 top
LOGO57  SFE_LOGO_NAME_FLAME.1_INCH  [SFE_LOGO_NAME_FLAME_.1]  151.76,94.11 0 bottom
LOGO58  SFE_LOGO_FLAME.1_INCH  [SFE_LOGO_FLAME_.1]  148.97,80.39 0 top
LOGO59  SFE_LOGO_NAME_FLAME.1_INCH  [SFE_LOGO_NAME_FLAME_.1]  182.75,94.11 0 bottom
LOGO60  SFE_LOGO_FLAME.1_INCH  [SFE_LOGO_FLAME_.1]  179.96,80.39 0 top
LOGO61  SFE_LOGO_NAME_FLAME.1_INCH  [SFE_LOGO_NAME_FLAME_.1]  213.74,94.11 0 bottom
LOGO62  SFE_LOGO_FLAME.1_INCH  [SFE_LOGO_FLAME_.1]  210.95,80.39 0 top
LOGO63  SFE_LOGO_NAME_FLAME.1_INCH  [SFE_LOGO_NAME_FLAME_.1]  244.73,94.11 0 bottom
LOGO64  SFE_LOGO_FLAME.1_INCH  [SFE_LOGO_FLAME_.1]  241.94,80.39 0 top
LOGO65  SFE_LOGO_NAME_FLAME.1_INCH  [SFE_LOGO_NAME_FLAME_.1]  27.81,117.47 0 bottom
LOGO66  SFE_LOGO_FLAME.1_INCH  [SFE_LOGO_FLAME_.1]  25.02,103.76 0 top
LOGO67  SFE_LOGO_NAME_FLAME.1_INCH  [SFE_LOGO_NAME_FLAME_.1]  58.8,117.47 0 bottom
LOGO68  SFE_LOGO_FLAME.1_INCH  [SFE_LOGO_FLAME_.1]  56.01,103.76 0 top
LOGO69  SFE_LOGO_NAME_FLAME.1_INCH  [SFE_LOGO_NAME_FLAME_.1]  89.79,117.47 0 bottom
LOGO70  SFE_LOGO_FLAME.1_INCH  [SFE_LOGO_FLAME_.1]  87,103.76 0 top
LOGO71  SFE_LOGO_NAME_FLAME.1_INCH  [SFE_LOGO_NAME_FLAME_.1]  120.78,117.47 0 bottom
LOGO72  SFE_LOGO_FLAME.1_INCH  [SFE_LOGO_FLAME_.1]  117.98,103.76 0 top
LOGO73  SFE_LOGO_NAME_FLAME.1_INCH  [SFE_LOGO_NAME_FLAME_.1]  151.76,117.47 0 bottom
LOGO74  SFE_LOGO_FLAME.1_INCH  [SFE_LOGO_FLAME_.1]  148.97,103.76 0 top
LOGO75  SFE_LOGO_NAME_FLAME.1_INCH  [SFE_LOGO_NAME_FLAME_.1]  182.75,117.47 0 bottom
LOGO76  SFE_LOGO_FLAME.1_INCH  [SFE_LOGO_FLAME_.1]  179.96,103.76 0 top
LOGO77  SFE_LOGO_NAME_FLAME.1_INCH  [SFE_LOGO_NAME_FLAME_.1]  213.74,117.47 0 bottom
LOGO78  SFE_LOGO_FLAME.1_INCH  [SFE_LOGO_FLAME_.1]  210.95,103.76 0 top
LOGO79  SFE_LOGO_NAME_FLAME.1_INCH  [SFE_LOGO_NAME_FLAME_.1]  244.73,117.47 0 bottom
LOGO80  SFE_LOGO_FLAME.1_INCH  [SFE_LOGO_FLAME_.1]  241.94,103.76 0 top
Q1  MMBT4403  [SOT23-3]  15.75,23.69 90 top
Q2  MMBT4403  [SOT23-3]  46.74,23.69 90 top
Q3  MMBT4403  [SOT23-3]  77.72,23.69 90 top
Q4  MMBT4403  [SOT23-3]  108.71,23.69 90 top
Q5  MMBT4403  [SOT23-3]  139.7,23.69 90 top
Q6  MMBT4403  [SOT23-3]  170.69,23.69 90 top
Q7  MMBT4403  [SOT23-3]  201.68,23.69 90 top
Q8  MMBT4403  [SOT23-3]  232.66,23.69 90 top
Q9  MMBT4403  [SOT23-3]  15.75,47.05 90 top
Q10  MMBT4403  [SOT23-3]  46.74,47.05 90 top
Q11  MMBT4403  [SOT23-3]  77.72,47.05 90 top
Q12  MMBT4403  [SOT23-3]  108.71,47.05 90 top
Q13  MMBT4403  [SOT23-3]  139.7,47.05 90 top
Q14  MMBT4403  [SOT23-3]  170.69,47.05 90 top
Q15  MMBT4403  [SOT23-3]  201.68,47.05 90 top
Q16  MMBT4403  [SOT23-3]  232.66,47.05 90 top
Q17  MMBT4403  [SOT23-3]  15.75,70.42 90 top
Q18  MMBT4403  [SOT23-3]  46.74,70.42 90 top
Q19  MMBT4403  [SOT23-3]  77.72,70.42 90 top
Q20  MMBT4403  [SOT23-3]  108.71,70.42 90 top
Q21  MMBT4403  [SOT23-3]  139.7,70.42 90 top
Q22  MMBT4403  [SOT23-3]  170.69,70.42 90 top
Q23  MMBT4403  [SOT23-3]  201.68,70.42 90 top
Q24  MMBT4403  [SOT23-3]  232.66,70.42 90 top
Q25  MMBT4403  [SOT23-3]  15.75,93.79 90 top
Q26  MMBT4403  [SOT23-3]  46.74,93.79 90 top
Q27  MMBT4403  [SOT23-3]  77.72,93.79 90 top
Q28  MMBT4403  [SOT23-3]  108.71,93.79 90 top
Q29  MMBT4403  [SOT23-3]  139.7,93.79 90 top
Q30  MMBT4403  [SOT23-3]  170.69,93.79 90 top
Q31  MMBT4403  [SOT23-3]  201.68,93.79 90 top
Q32  MMBT4403  [SOT23-3]  232.66,93.79 90 top
Q33  MMBT4403  [SOT23-3]  15.75,117.16 90 top
Q34  MMBT4403  [SOT23-3]  46.74,117.16 90 top
Q35  MMBT4403  [SOT23-3]  77.72,117.16 90 top
Q36  MMBT4403  [SOT23-3]  108.71,117.16 90 top
Q37  MMBT4403  [SOT23-3]  139.7,117.16 90 top
Q38  MMBT4403  [SOT23-3]  170.69,117.16 90 top
Q39  MMBT4403  [SOT23-3]  201.68,117.16 90 top
Q40  MMBT4403  [SOT23-3]  232.66,117.16 90 top
R1  20k  [0603-RES]  15.75,18.92 0 top
R2  8.2K  [0603-RES]  15.75,17.02 0 top
R3  100  [0603-RES]  15.75,13.21 0 top
R4  100  [0603-RES]  15.75,11.3 0 top
R5  10K  [0603-RES]  28.45,20.83 0 top
R6  100  [0603-RES]  46.74,13.21 0 top
R7  100  [0603-RES]  46.74,11.3 0 top
R8  8.2K  [0603-RES]  46.74,17.02 0 top
R9  20k  [0603-RES]  46.74,18.92 0 top
R10  10K  [0603-RES]  59.44,20.83 0 top
R11  100  [0603-RES]  77.72,13.21 0 top
R12  100  [0603-RES]  77.72,11.3 0 top
R13  8.2K  [0603-RES]  77.72,17.02 0 top
R14  20k  [0603-RES]  77.72,18.92 0 top
R15  10K  [0603-RES]  90.42,20.83 0 top
R16  100  [0603-RES]  108.71,13.21 0 top
R17  100  [0603-RES]  108.71,11.3 0 top
R18  8.2K  [0603-RES]  108.71,17.02 0 top
R19  20k  [0603-RES]  108.71,18.92 0 top
R20  10K  [0603-RES]  121.41,20.83 0 top
R21  100  [0603-RES]  139.7,13.21 0 top
R22  100  [0603-RES]  139.7,11.3 0 top
R23  8.2K  [0603-RES]  139.7,17.02 0 top
R24  20k  [0603-RES]  139.7,18.92 0 top
R25  10K  [0603-RES]  152.4,20.83 0 top
R26  100  [0603-RES]  170.69,13.21 0 top
R27  100  [0603-RES]  170.69,11.3 0 top
R28  8.2K  [0603-RES]  170.69,17.02 0 top
R29  20k  [0603-RES]  170.69,18.92 0 top
R30  10K  [0603-RES]  183.39,20.83 0 top
R31  100  [0603-RES]  201.68,13.21 0 top
R32  100  [0603-RES]  201.68,11.3 0 top
R33  8.2K  [0603-RES]  201.68,17.02 0 top
R34  20k  [0603-RES]  201.68,18.92 0 top
R35  10K  [0603-RES]  214.38,20.83 0 top
R36  100  [0603-RES]  232.66,13.21 0 top
R37  100  [0603-RES]  232.66,11.3 0 top
R38  8.2K  [0603-RES]  232.66,17.02 0 top
R39  20k  [0603-RES]  232.66,18.92 0 top
R40  10K  [0603-RES]  245.36,20.83 0 top
R41  100  [0603-RES]  15.75,36.58 0 top
R42  100  [0603-RES]  15.75,34.67 0 top
R43  8.2K  [0603-RES]  15.75,40.39 0 top
R44  20k  [0603-RES]  15.75,42.29 0 top
R45  10K  [0603-RES]  28.45,44.2 0 top
R46  100  [0603-RES]  46.74,36.58 0 top
R47  100  [0603-RES]  46.74,34.67 0 top
R48  8.2K  [0603-RES]  46.74,40.39 0 top
R49  20k  [0603-RES]  46.74,42.29 0 top
R50  10K  [0603-RES]  59.44,44.2 0 top
R51  100  [0603-RES]  77.72,36.58 0 top
R52  100  [0603-RES]  77.72,34.67 0 top
R53  8.2K  [0603-RES]  77.72,40.39 0 top
R54  20k  [0603-RES]  77.72,42.29 0 top
R55  10K  [0603-RES]  90.42,44.2 0 top
R56  100  [0603-RES]  108.71,36.58 0 top
R57  100  [0603-RES]  108.71,34.67 0 top
R58  8.2K  [0603-RES]  108.71,40.39 0 top
R59  20k  [0603-RES]  108.71,42.29 0 top
R60  10K  [0603-RES]  121.41,44.2 0 top
R61  100  [0603-RES]  139.7,36.58 0 top
R62  100  [0603-RES]  139.7,34.67 0 top
R63  8.2K  [0603-RES]  139.7,40.39 0 top
R64  20k  [0603-RES]  139.7,42.29 0 top
R65  10K  [0603-RES]  152.4,44.2 0 top
R66  100  [0603-RES]  170.69,36.58 0 top
R67  100  [0603-RES]  170.69,34.67 0 top
R68  8.2K  [0603-RES]  170.69,40.39 0 top
R69  20k  [0603-RES]  170.69,42.29 0 top
R70  10K  [0603-RES]  183.39,44.2 0 top
R71  100  [0603-RES]  201.68,36.58 0 top
R72  100  [0603-RES]  201.68,34.67 0 top
R73  8.2K  [0603-RES]  201.68,40.39 0 top
R74  20k  [0603-RES]  201.68,42.29 0 top
R75  10K  [0603-RES]  214.38,44.2 0 top
R76  100  [0603-RES]  232.66,36.58 0 top
R77  100  [0603-RES]  232.66,34.67 0 top
R78  8.2K  [0603-RES]  232.66,40.39 0 top
R79  20k  [0603-RES]  232.66,42.29 0 top
R80  10K  [0603-RES]  245.36,44.2 0 top
R81  100  [0603-RES]  15.75,59.94 0 top
R82  100  [0603-RES]  15.75,58.04 0 top
R83  8.2K  [0603-RES]  15.75,63.75 0 top
R84  20k  [0603-RES]  15.75,65.66 0 top
R85  10K  [0603-RES]  28.45,67.56 0 top
R86  100  [0603-RES]  46.74,59.94 0 top
R87  100  [0603-RES]  46.74,58.04 0 top
R88  8.2K  [0603-RES]  46.74,63.75 0 top
R89  20k  [0603-RES]  46.74,65.66 0 top
R90  10K  [0603-RES]  59.44,67.56 0 top
R91  100  [0603-RES]  77.72,59.94 0 top
R92  100  [0603-RES]  77.72,58.04 0 top
R93  8.2K  [0603-RES]  77.72,63.75 0 top
R94  20k  [0603-RES]  77.72,65.66 0 top
R95  10K  [0603-RES]  90.42,67.56 0 top
R96  100  [0603-RES]  108.71,59.94 0 top
R97  100  [0603-RES]  108.71,58.04 0 top
R98  8.2K  [0603-RES]  108.71,63.75 0 top
R99  20k  [0603-RES]  108.71,65.66 0 top
R100  10K  [0603-RES]  121.41,67.56 0 top
R101  100  [0603-RES]  139.7,59.94 0 top
R102  100  [0603-RES]  139.7,58.04 0 top
R103  8.2K  [0603-RES]  139.7,63.75 0 top
R104  20k  [0603-RES]  139.7,65.66 0 top
R105  10K  [0603-RES]  152.4,67.56 0 top
R106  100  [0603-RES]  170.69,59.94 0 top
R107  100  [0603-RES]  170.69,58.04 0 top
R108  8.2K  [0603-RES]  170.69,63.75 0 top
R109  20k  [0603-RES]  170.69,65.66 0 top
R110  10K  [0603-RES]  183.39,67.56 0 top
R111  100  [0603-RES]  201.68,59.94 0 top
R112  100  [0603-RES]  201.68,58.04 0 top
R113  8.2K  [0603-RES]  201.68,63.75 0 top
R114  20k  [0603-RES]  201.68,65.66 0 top
R115  10K  [0603-RES]  214.38,67.56 0 top
R116  100  [0603-RES]  232.66,59.94 0 top
R117  100  [0603-RES]  232.66,58.04 0 top
R118  8.2K  [0603-RES]  232.66,63.75 0 top
R119  20k  [0603-RES]  232.66,65.66 0 top
R120  10K  [0603-RES]  245.36,67.56 0 top
R121  100  [0603-RES]  15.75,83.31 0 top
R122  100  [0603-RES]  15.75,81.41 0 top
R123  8.2K  [0603-RES]  15.75,87.12 0 top
R124  20k  [0603-RES]  15.75,89.03 0 top
R125  10K  [0603-RES]  28.45,90.93 0 top
R126  100  [0603-RES]  46.74,83.31 0 top
R127  100  [0603-RES]  46.74,81.41 0 top
R128  8.2K  [0603-RES]  46.74,87.12 0 top
R129  20k  [0603-RES]  46.74,89.03 0 top
R130  10K  [0603-RES]  59.44,90.93 0 top
R131  100  [0603-RES]  77.72,83.31 0 top
R132  100  [0603-RES]  77.72,81.41 0 top
R133  8.2K  [0603-RES]  77.72,87.12 0 top
R134  20k  [0603-RES]  77.72,89.03 0 top
R135  10K  [0603-RES]  90.42,90.93 0 top
R136  100  [0603-RES]  108.71,83.31 0 top
R137  100  [0603-RES]  108.71,81.41 0 top
R138  8.2K  [0603-RES]  108.71,87.12 0 top
R139  20k  [0603-RES]  108.71,89.03 0 top
R140  10K  [0603-RES]  121.41,90.93 0 top
R141  100  [0603-RES]  139.7,83.31 0 top
R142  100  [0603-RES]  139.7,81.41 0 top
R143  8.2K  [0603-RES]  139.7,87.12 0 top
R144  20k  [0603-RES]  139.7,89.03 0 top
R145  10K  [0603-RES]  152.4,90.93 0 top
R146  100  [0603-RES]  170.69,83.31 0 top
R147  100  [0603-RES]  170.69,81.41 0 top
R148  8.2K  [0603-RES]  170.69,87.12 0 top
R149  20k  [0603-RES]  170.69,89.03 0 top
R150  10K  [0603-RES]  183.39,90.93 0 top
R151  100  [0603-RES]  201.68,83.31 0 top
R152  100  [0603-RES]  201.68,81.41 0 top
R153  8.2K  [0603-RES]  201.68,87.12 0 top
R154  20k  [0603-RES]  201.68,89.03 0 top
R155  10K  [0603-RES]  214.38,90.93 0 top
R156  100  [0603-RES]  232.66,83.31 0 top
R157  100  [0603-RES]  232.66,81.41 0 top
R158  8.2K  [0603-RES]  232.66,87.12 0 top
R159  20k  [0603-RES]  232.66,89.03 0 top
R160  10K  [0603-RES]  245.36,90.93 0 top
R161  100  [0603-RES]  15.75,106.68 0 top
R162  100  [0603-RES]  15.75,104.78 0 top
R163  8.2K  [0603-RES]  15.75,110.49 0 top
R164  20k  [0603-RES]  15.75,112.39 0 top
R165  10K  [0603-RES]  28.45,114.3 0 top
R166  100  [0603-RES]  46.74,106.68 0 top
R167  100  [0603-RES]  46.74,104.78 0 top
R168  8.2K  [0603-RES]  46.74,110.49 0 top
R169  20k  [0603-RES]  46.74,112.39 0 top
R170  10K  [0603-RES]  59.44,114.3 0 top
R171  100  [0603-RES]  77.72,106.68 0 top
R172  100  [0603-RES]  77.72,104.78 0 top
R173  8.2K  [0603-RES]  77.72,110.49 0 top
R174  20k  [0603-RES]  77.72,112.39 0 top
R175  10K  [0603-RES]  90.42,114.3 0 top
R176  100  [0603-RES]  108.71,106.68 0 top
R177  100  [0603-RES]  108.71,104.78 0 top
R178  8.2K  [0603-RES]  108.71,110.49 0 top
R179  20k  [0603-RES]  108.71,112.39 0 top
R180  10K  [0603-RES]  121.41,114.3 0 top
R181  100  [0603-RES]  139.7,106.68 0 top
R182  100  [0603-RES]  139.7,104.78 0 top
R183  8.2K  [0603-RES]  139.7,110.49 0 top
R184  20k  [0603-RES]  139.7,112.39 0 top
R185  10K  [0603-RES]  152.4,114.3 0 top
R186  100  [0603-RES]  170.69,106.68 0 top
R187  100  [0603-RES]  170.69,104.78 0 top
R188  8.2K  [0603-RES]  170.69,110.49 0 top
R189  20k  [0603-RES]  170.69,112.39 0 top
R190  10K  [0603-RES]  183.39,114.3 0 top
R191  100  [0603-RES]  201.68,106.68 0 top
R192  100  [0603-RES]  201.68,104.78 0 top
R193  8.2K  [0603-RES]  201.68,110.49 0 top
R194  20k  [0603-RES]  201.68,112.39 0 top
R195  10K  [0603-RES]  214.38,114.3 0 top
R196  100  [0603-RES]  232.66,106.68 0 top
R197  100  [0603-RES]  232.66,104.78 0 top
R198  8.2K  [0603-RES]  232.66,110.49 0 top
R199  20k  [0603-RES]  232.66,112.39 0 top
R200  10K  [0603-RES]  245.36,114.3 0 top
SJ1  [PAD-JUMPER-2-NC_BY_TRACE_YES_SILK]  53.09,19.56 180 bottom
SJ2  [PAD-JUMPER-2-NC_BY_TRACE_YES_SILK]  22.1,19.56 180 bottom
SJ3  [PAD-JUMPER-2-NC_BY_TRACE_YES_SILK]  84.07,19.56 180 bottom
SJ4  [PAD-JUMPER-2-NC_BY_TRACE_YES_SILK]  115.06,19.56 180 bottom
SJ5  [PAD-JUMPER-2-NC_BY_TRACE_YES_SILK]  146.05,19.56 180 bottom
SJ6  [PAD-JUMPER-2-NC_BY_TRACE_YES_SILK]  177.04,19.56 180 bottom
SJ7  [PAD-JUMPER-2-NC_BY_TRACE_YES_SILK]  208.03,19.56 180 bottom
SJ8  [PAD-JUMPER-2-NC_BY_TRACE_YES_SILK]  239.01,19.56 180 bottom
SJ9  [PAD-JUMPER-2-NC_BY_TRACE_YES_SILK]  22.1,42.93 180 bottom
SJ10  [PAD-JUMPER-2-NC_BY_TRACE_YES_SILK]  53.09,42.93 180 bottom
SJ11  [PAD-JUMPER-2-NC_BY_TRACE_YES_SILK]  84.07,42.93 180 bottom
SJ12  [PAD-JUMPER-2-NC_BY_TRACE_YES_SILK]  115.06,42.93 180 bottom
SJ13  [PAD-JUMPER-2-NC_BY_TRACE_YES_SILK]  146.05,42.93 180 bottom
SJ14  [PAD-JUMPER-2-NC_BY_TRACE_YES_SILK]  177.04,42.93 180 bottom
SJ15  [PAD-JUMPER-2-NC_BY_TRACE_YES_SILK]  208.03,42.93 180 bottom
SJ16  [PAD-JUMPER-2-NC_BY_TRACE_YES_SILK]  239.01,42.93 180 bottom
SJ17  [PAD-JUMPER-2-NC_BY_TRACE_YES_SILK]  22.1,66.29 180 bottom
SJ18  [PAD-JUMPER-2-NC_BY_TRACE_YES_SILK]  53.09,66.29 180 bottom
SJ19  [PAD-JUMPER-2-NC_BY_TRACE_YES_SILK]  84.07,66.29 180 bottom
SJ20  [PAD-JUMPER-2-NC_BY_TRACE_YES_SILK]  115.06,66.29 180 bottom
SJ21  [PAD-JUMPER-2-NC_BY_TRACE_YES_SILK]  146.05,66.29 180 bottom
SJ22  [PAD-JUMPER-2-NC_BY_TRACE_YES_SILK]  177.04,66.29 180 bottom
SJ23  [PAD-JUMPER-2-NC_BY_TRACE_YES_SILK]  208.03,66.29 180 bottom
SJ24  [PAD-JUMPER-2-NC_BY_TRACE_YES_SILK]  239.01,66.29 180 bottom
SJ25  [PAD-JUMPER-2-NC_BY_TRACE_YES_SILK]  22.1,89.66 180 bottom
SJ26  [PAD-JUMPER-2-NC_BY_TRACE_YES_SILK]  53.09,89.66 180 bottom
SJ27  [PAD-JUMPER-2-NC_BY_TRACE_YES_SILK]  84.07,89.66 180 bottom
SJ28  [PAD-JUMPER-2-NC_BY_TRACE_YES_SILK]  115.06,89.66 180 bottom
SJ29  [PAD-JUMPER-2-NC_BY_TRACE_YES_SILK]  146.05,89.66 180 bottom
SJ30  [PAD-JUMPER-2-NC_BY_TRACE_YES_SILK]  177.04,89.66 180 bottom
SJ31  [PAD-JUMPER-2-NC_BY_TRACE_YES_SILK]  208.03,89.66 180 bottom
SJ32  [PAD-JUMPER-2-NC_BY_TRACE_YES_SILK]  239.01,89.66 180 bottom
SJ33  [PAD-JUMPER-2-NC_BY_TRACE_YES_SILK]  22.1,113.03 180 bottom
SJ34  [PAD-JUMPER-2-NC_BY_TRACE_YES_SILK]  53.09,113.03 180 bottom
SJ35  [PAD-JUMPER-2-NC_BY_TRACE_YES_SILK]  84.07,113.03 180 bottom
SJ36  [PAD-JUMPER-2-NC_BY_TRACE_YES_SILK]  115.06,113.03 180 bottom
SJ37  [PAD-JUMPER-2-NC_BY_TRACE_YES_SILK]  146.05,113.03 180 bottom
SJ38  [PAD-JUMPER-2-NC_BY_TRACE_YES_SILK]  177.04,113.03 180 bottom
SJ39  [PAD-JUMPER-2-NC_BY_TRACE_YES_SILK]  208.03,113.03 180 bottom
SJ40  [PAD-JUMPER-2-NC_BY_TRACE_YES_SILK]  239.01,113.03 180 bottom
STANDOFF1  STAND-OFF  [STAND-OFF]  9.4,9.4 0 top
STANDOFF2  STAND-OFF  [STAND-OFF]  34.8,9.4 0 top
STANDOFF3  STAND-OFF  [STAND-OFF]  9.4,27.18 0 top
STANDOFF4  STAND-OFF  [STAND-OFF]  34.8,27.18 0 top
STANDOFF5  STAND-OFF  [STAND-OFF]  40.39,9.4 0 top
STANDOFF6  STAND-OFF  [STAND-OFF]  65.79,9.4 0 top
STANDOFF7  STAND-OFF  [STAND-OFF]  40.39,27.18 0 top
STANDOFF8  STAND-OFF  [STAND-OFF]  65.79,27.18 0 top
STANDOFF9  STAND-OFF  [STAND-OFF]  71.37,9.4 0 top
STANDOFF10  STAND-OFF  [STAND-OFF]  96.77,9.4 0 top
STANDOFF11  STAND-OFF  [STAND-OFF]  71.37,27.18 0 top
STANDOFF12  STAND-OFF  [STAND-OFF]  96.77,27.18 0 top
STANDOFF13  STAND-OFF  [STAND-OFF]  102.36,9.4 0 top
STANDOFF14  STAND-OFF  [STAND-OFF]  127.76,9.4 0 top
STANDOFF15  STAND-OFF  [STAND-OFF]  102.36,27.18 0 top
STANDOFF16  STAND-OFF  [STAND-OFF]  127.76,27.18 0 top
STANDOFF17  STAND-OFF  [STAND-OFF]  133.35,9.4 0 top
STANDOFF18  STAND-OFF  [STAND-OFF]  158.75,9.4 0 top
STANDOFF19  STAND-OFF  [STAND-OFF]  133.35,27.18 0 top
STANDOFF20  STAND-OFF  [STAND-OFF]  158.75,27.18 0 top
STANDOFF21  STAND-OFF  [STAND-OFF]  164.34,9.4 0 top
STANDOFF22  STAND-OFF  [STAND-OFF]  189.74,9.4 0 top
STANDOFF23  STAND-OFF  [STAND-OFF]  164.34,27.18 0 top
STANDOFF24  STAND-OFF  [STAND-OFF]  189.74,27.18 0 top
STANDOFF25  STAND-OFF  [STAND-OFF]  195.33,9.4 0 top
STANDOFF26  STAND-OFF  [STAND-OFF]  220.73,9.4 0 top
STANDOFF27  STAND-OFF  [STAND-OFF]  195.33,27.18 0 top
STANDOFF28  STAND-OFF  [STAND-OFF]  220.73,27.18 0 top
STANDOFF29  STAND-OFF  [STAND-OFF]  226.31,9.4 0 top
STANDOFF30  STAND-OFF  [STAND-OFF]  251.71,9.4 0 top
STANDOFF31  STAND-OFF  [STAND-OFF]  226.31,27.18 0 top
STANDOFF32  STAND-OFF  [STAND-OFF]  251.71,27.18 0 top
STANDOFF33  STAND-OFF  [STAND-OFF]  9.4,32.77 0 top
STANDOFF34  STAND-OFF  [STAND-OFF]  34.8,32.77 0 top
STANDOFF35  STAND-OFF  [STAND-OFF]  9.4,50.55 0 top
STANDOFF36  STAND-OFF  [STAND-OFF]  34.8,50.55 0 top
STANDOFF37  STAND-OFF  [STAND-OFF]  40.39,32.77 0 top
STANDOFF38  STAND-OFF  [STAND-OFF]  65.79,32.77 0 top
STANDOFF39  STAND-OFF  [STAND-OFF]  40.39,50.55 0 top
STANDOFF40  STAND-OFF  [STAND-OFF]  65.79,50.55 0 top
STANDOFF41  STAND-OFF  [STAND-OFF]  71.37,32.77 0 top
STANDOFF42  STAND-OFF  [STAND-OFF]  96.77,32.77 0 top
STANDOFF43  STAND-OFF  [STAND-OFF]  71.37,50.55 0 top
STANDOFF44  STAND-OFF  [STAND-OFF]  96.77,50.55 0 top
STANDOFF45  STAND-OFF  [STAND-OFF]  102.36,32.77 0 top
STANDOFF46  STAND-OFF  [STAND-OFF]  127.76,32.77 0 top
STANDOFF47  STAND-OFF  [STAND-OFF]  102.36,50.55 0 top
STANDOFF48  STAND-OFF  [STAND-OFF]  127.76,50.55 0 top
STANDOFF49  STAND-OFF  [STAND-OFF]  133.35,32.77 0 top
STANDOFF50  STAND-OFF  [STAND-OFF]  158.75,32.77 0 top
STANDOFF51  STAND-OFF  [STAND-OFF]  133.35,50.55 0 top
STANDOFF52  STAND-OFF  [STAND-OFF]  158.75,50.55 0 top
STANDOFF53  STAND-OFF  [STAND-OFF]  164.34,32.77 0 top
STANDOFF54  STAND-OFF  [STAND-OFF]  189.74,32.77 0 top
STANDOFF55  STAND-OFF  [STAND-OFF]  164.34,50.55 0 top
STANDOFF56  STAND-OFF  [STAND-OFF]  189.74,50.55 0 top
STANDOFF57  STAND-OFF  [STAND-OFF]  195.33,32.77 0 top
STANDOFF58  STAND-OFF  [STAND-OFF]  220.73,32.77 0 top
STANDOFF59  STAND-OFF  [STAND-OFF]  195.33,50.55 0 top
STANDOFF60  STAND-OFF  [STAND-OFF]  220.73,50.55 0 top
STANDOFF61  STAND-OFF  [STAND-OFF]  226.31,32.77 0 top
STANDOFF62  STAND-OFF  [STAND-OFF]  251.71,32.77 0 top
STANDOFF63  STAND-OFF  [STAND-OFF]  226.31,50.55 0 top
STANDOFF64  STAND-OFF  [STAND-OFF]  251.71,50.55 0 top
STANDOFF65  STAND-OFF  [STAND-OFF]  9.4,56.13 0 top
STANDOFF66  STAND-OFF  [STAND-OFF]  34.8,56.13 0 top
STANDOFF67  STAND-OFF  [STAND-OFF]  9.4,73.91 0 top
STANDOFF68  STAND-OFF  [STAND-OFF]  34.8,73.91 0 top
STANDOFF69  STAND-OFF  [STAND-OFF]  40.39,56.13 0 top
STANDOFF70  STAND-OFF  [STAND-OFF]  65.79,56.13 0 top
STANDOFF71  STAND-OFF  [STAND-OFF]  40.39,73.91 0 top
STANDOFF72  STAND-OFF  [STAND-OFF]  65.79,73.91 0 top
STANDOFF73  STAND-OFF  [STAND-OFF]  71.37,56.13 0 top
STANDOFF74  STAND-OFF  [STAND-OFF]  96.77,56.13 0 top
STANDOFF75  STAND-OFF  [STAND-OFF]  71.37,73.91 0 top
STANDOFF76  STAND-OFF  [STAND-OFF]  96.77,73.91 0 top
STANDOFF77  STAND-OFF  [STAND-OFF]  102.36,56.13 0 top
STANDOFF78  STAND-OFF  [STAND-OFF]  127.76,56.13 0 top
STANDOFF79  STAND-OFF  [STAND-OFF]  102.36,73.91 0 top
STANDOFF80  STAND-OFF  [STAND-OFF]  127.76,73.91 0 top
STANDOFF81  STAND-OFF  [STAND-OFF]  133.35,56.13 0 top
STANDOFF82  STAND-OFF  [STAND-OFF]  158.75,56.13 0 top
STANDOFF83  STAND-OFF  [STAND-OFF]  133.35,73.91 0 top
STANDOFF84  STAND-OFF  [STAND-OFF]  158.75,73.91 0 top
STANDOFF85  STAND-OFF  [STAND-OFF]  164.34,56.13 0 top
STANDOFF86  STAND-OFF  [STAND-OFF]  189.74,56.13 0 top
STANDOFF87  STAND-OFF  [STAND-OFF]  164.34,73.91 0 top
STANDOFF88  STAND-OFF  [STAND-OFF]  189.74,73.91 0 top
STANDOFF89  STAND-OFF  [STAND-OFF]  195.33,56.13 0 top
STANDOFF90  STAND-OFF  [STAND-OFF]  220.73,56.13 0 top
STANDOFF91  STAND-OFF  [STAND-OFF]  195.33,73.91 0 top
STANDOFF92  STAND-OFF  [STAND-OFF]  220.73,73.91 0 top
STANDOFF93  STAND-OFF  [STAND-OFF]  226.31,56.13 0 top
STANDOFF94  STAND-OFF  [STAND-OFF]  251.71,56.13 0 top
STANDOFF95  STAND-OFF  [STAND-OFF]  226.31,73.91 0 top
STANDOFF96  STAND-OFF  [STAND-OFF]  251.71,73.91 0 top
STANDOFF97  STAND-OFF  [STAND-OFF]  9.4,79.5 0 top
STANDOFF98  STAND-OFF  [STAND-OFF]  34.8,79.5 0 top
STANDOFF99  STAND-OFF  [STAND-OFF]  9.4,97.28 0 top
STANDOFF100  STAND-OFF  [STAND-OFF]  34.8,97.28 0 top
STANDOFF101  STAND-OFF  [STAND-OFF]  40.39,79.5 0 top
STANDOFF102  STAND-OFF  [STAND-OFF]  65.79,79.5 0 top
STANDOFF103  STAND-OFF  [STAND-OFF]  40.39,97.28 0 top
STANDOFF104  STAND-OFF  [STAND-OFF]  65.79,97.28 0 top
STANDOFF105  STAND-OFF  [STAND-OFF]  71.37,79.5 0 top
STANDOFF106  STAND-OFF  [STAND-OFF]  96.77,79.5 0 top
STANDOFF107  STAND-OFF  [STAND-OFF]  71.37,97.28 0 top
STANDOFF108  STAND-OFF  [STAND-OFF]  96.77,97.28 0 top
STANDOFF109  STAND-OFF  [STAND-OFF]  102.36,79.5 0 top
STANDOFF110  STAND-OFF  [STAND-OFF]  127.76,79.5 0 top
STANDOFF111  STAND-OFF  [STAND-OFF]  102.36,97.28 0 top
STANDOFF112  STAND-OFF  [STAND-OFF]  127.76,97.28 0 top
STANDOFF113  STAND-OFF  [STAND-OFF]  133.35,79.5 0 top
STANDOFF114  STAND-OFF  [STAND-OFF]  158.75,79.5 0 top
STANDOFF115  STAND-OFF  [STAND-OFF]  133.35,97.28 0 top
STANDOFF116  STAND-OFF  [STAND-OFF]  158.75,97.28 0 top
STANDOFF117  STAND-OFF  [STAND-OFF]  164.34,79.5 0 top
STANDOFF118  STAND-OFF  [STAND-OFF]  189.74,79.5 0 top
STANDOFF119  STAND-OFF  [STAND-OFF]  164.34,97.28 0 top
STANDOFF120  STAND-OFF  [STAND-OFF]  189.74,97.28 0 top
STANDOFF121  STAND-OFF  [STAND-OFF]  195.33,79.5 0 top
STANDOFF122  STAND-OFF  [STAND-OFF]  220.73,79.5 0 top
STANDOFF123  STAND-OFF  [STAND-OFF]  195.33,97.28 0 top
STANDOFF124  STAND-OFF  [STAND-OFF]  220.73,97.28 0 top
STANDOFF125  STAND-OFF  [STAND-OFF]  226.31,79.5 0 top
STANDOFF126  STAND-OFF  [STAND-OFF]  251.71,79.5 0 top
STANDOFF127  STAND-OFF  [STAND-OFF]  226.31,97.28 0 top
STANDOFF128  STAND-OFF  [STAND-OFF]  251.71,97.28 0 top
STANDOFF129  STAND-OFF  [STAND-OFF]  9.4,102.87 0 top
STANDOFF130  STAND-OFF  [STAND-OFF]  34.8,102.87 0 top
STANDOFF131  STAND-OFF  [STAND-OFF]  9.4,120.65 0 top
STANDOFF132  STAND-OFF  [STAND-OFF]  34.8,120.65 0 top